# EAGLE board source_eagle (EAGLE 9.6.2)
REV: B
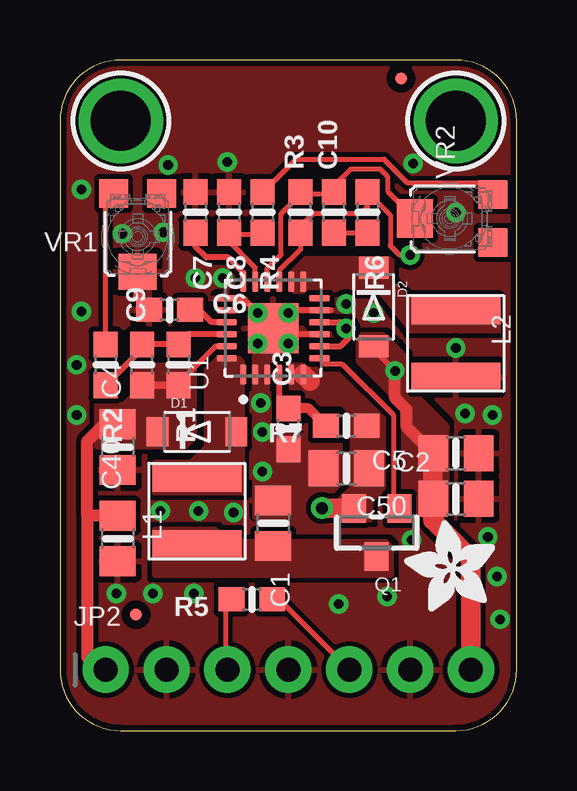
[diagram p0: board, top side]
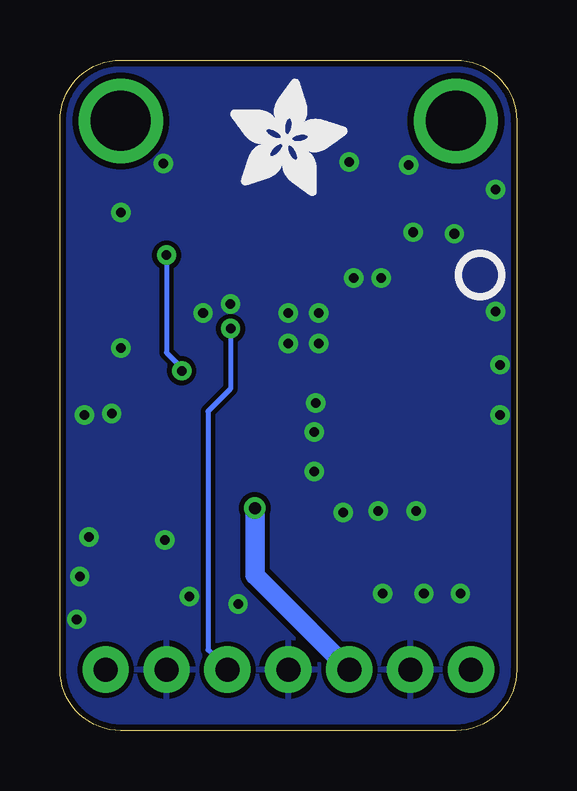
[diagram p1: board, bottom side, seen from below]

Size 19.05 x 27.94 mm. Coordinates in mm from the lower left corner, seen from the top.
Outline: 0,25.4 0,2.54 arc90 2.54,0 16.51,0 arc90 19.05,2.54 19.05,25.4 arc90 16.51,27.94 2.54,27.94 arc90 0,25.4
Copper layers (1*16): Top 0.035mm / dielectric 1.5mm / Bottom 0.035mm
Design rules "adafruit 7-7": minimum track width 7mil, minimum drill 15.5mil, track to track 8mil, track to pad 7mil, pad to pad 7mil, via to via 7mil, smd to smd 7mil, copper to edge 10mil, drill to drill 8mil, minimum pad ring 10mil, minimum via ring 8mil, stop-mask expansion 2mil, vias tented up to drill 20mil, thermal gap 10mil
Net classes: 3 HIGHPOWER: width 0.254 mm, drill 0.483 mm

## Footprints (pad centres in the part's own frame; a part is rotated, then mirrored left to right if it is on the bottom)
0805-NO = smd 1.24 x 1.5: 1 -0.95,0; 2 0.95,0
0603-NO = smd 1.075 x 1: 1 -0.85,0; 2 0.85,0
SOD-123FL = smd 0.91 x 1.22: A 1.637,0; C -1.637,0
FIDUCIAL_0.5MM = smd 0.5 x 0.5: 1 0,0
1X07_ROUND_76 = drill 1 pad 1.93: 1 -7.62,0; 2 -5.08,0; 3 -2.54,0; 4 0,0; 5 2.54,0; 6 5.08,0; 7 7.62,0
INDUCTOR_4X4MM_NR401 = smd 1.2 x 3.7: P$1 -1.4,0; P$2 1.4,0
SOT23-WIDE = smd 1 x 1.2: 1 -0.95,-1; 2 0.95,-1; 3 0,1
QFN24_4MM = smd 0.84 x 0.26: 1 -1.935,1.25; 2 -1.935,0.75; 3 -1.935,0.25; 4 -1.935,-0.25; 5 -1.935,-0.75; 6 -1.935,-1.25; 13 1.935,-1.25; 14 1.935,-0.75; 15 1.935,-0.25; 16 1.935,0.25; 17 1.935,0.75; 18 1.935,1.25 | smd 0.26 x 0.84: 7 -1.25,-1.935; 8 -0.75,-1.935; 9 -0.25,-1.935; 10 0.25,-1.935; 11 0.75,-1.935; 12 1.25,-1.935; 19 1.25,1.935; 20 0.75,1.935; 21 0.25,1.935; 22 -0.25,1.935; 23 -0.75,1.935; 24 -1.25,1.935 | smd 2.1 x 2.1: 25 0,0
MOUNTINGHOLE_2.5_PLATED = drill 2.5 pad 3.2: P$1 0,0
TRIMPOT_BOURNS_TC33X-2 = smd 1.2 x 1.2: 1 -1,-1.8; 3 1,-1.8 | smd 1.6 x 1.5: 2 0,1.45

## Placement (x,y rotation side)
C1  22uF/16V  [0805-NO]  8.89,8.64 270 top
C2  22uF/16V  [0805-NO]  11.94,10.92 0 top
C3  0.1uF  [0603-NO]  9.53,12.57 90 top
C4  22uF/16V  [0805-NO]  2.41,11.81 90 top
C5  22uF/16V  [0805-NO]  16.51,11.56 180 top
C6  10nF  [0603-NO]  4.57,17.53 0 top
C7  4.7nF  [0603-NO]  5.65,21.59 270 top
C8  220nF  [0603-NO]  7.05,21.59 270 top
C9  15pF  [0603-NO]  3.43,15.24 90 top
C10  15pF  [0603-NO]  11.43,21.59 90 top
C40  22uF/16V  [0805-NO]  2.41,8 90 top
C50  22uF/16V  [0805-NO]  16.51,9.65 180 top
D1  MBR120  [SOD-123FL]  5.71,12.45 0 top
D2  MBR120  [SOD-123FL]  13.08,17.65 270 top
FID1  FIDUCIAL_0.5MM  [FIDUCIAL_0.5MM]  3.17,4.83 0 top
FID2  FIDUCIAL_0.5MM  [FIDUCIAL_0.5MM]  14.22,27.18 0 top
JP2  [1X07_ROUND_76]  9.53,2.54 0 top
L1  4.7uH 2A / YSMC0420V-4R7M  [INDUCTOR_4X4MM_NR401]  5.71,9.14 90 top
L2  4.7uH 2A / YSMC0420V-4R7M  [INDUCTOR_4X4MM_NR401]  16.51,16.13 270 top
PLABEL0  [PLABEL0]  1.91,4.19 0 top
PLABEL1  [PLABEL1]  4.45,0.89 0 top
PLABEL2  [PLABEL2]  6.86,4.19 0 top
PLABEL3  [PLABEL3]  9.53,0.89 0 top
PLABEL4  [PLABEL4]  12.06,4.32 0 top
PLABEL5  [PLABEL5]  14.61,0.89 0 top
PLABEL6  [PLABEL6]  17.14,4.19 0 top
PLABEL7  [PLABEL7]  9.53,25.4 0 top
PLABEL8  [PLABEL8]  1.02,20.7 90 top
PLABEL9  [PLABEL9]  16.51,18.99 0 top
PLABEL10  [PLABEL10]  8.89,20.45 0 bottom
PLABEL11  [PLABEL11]  9.53,10.54 0 bottom
Q1  AO3401A  [SOT23-WIDE]  13.21,8.26 180 top
R1  560K  [0603-NO]  4.95,15.24 270 top
R2  47K  [0603-NO]  1.91,15.24 270 top
R3  750K  [0603-NO]  10.03,21.59 90 top
R4  59K  [0603-NO]  8.45,21.59 270 top
R5  47K  [0603-NO]  8,5.46 180 top
R6  47K  [0603-NO]  12.83,21.59 270 top
R7  100  [0603-NO]  11.94,12.7 180 top
U1  TPS65131  [QFN24_4MM]  8.89,16.76 90 top
U$1  MOUNTINGHOLE2.5  [MOUNTINGHOLE_2.5_PLATED]  2.54,25.4 0 top
U$2  MOUNTINGHOLE2.5  [MOUNTINGHOLE_2.5_PLATED]  16.51,25.4 0 top
U$3  [ADAFRUIT_3.5MM]  18.16,4.95 90 top
U$4  [ADAFRUIT_5MM]  11.94,22.29 0 bottom
U$5  [PCBFEAT-REV-040]  1.52,18.99 0 bottom
VR1  100K  [TRIMPOT_BOURNS_TC33X-2]  3.24,20.57 180 top
VR2  100K  [TRIMPOT_BOURNS_TC33X-2]  16.26,21.34 90 top

## Library data of the parts
C1-C10 C40 C50 D1 D2 FID1 FID2 JP2 L1 L2 R1-R7 U$3-U$5 = microbuilder
PLABEL0 PLABEL1-PLABEL11 = pinguin
Q1 = microbuilder; ROT: 270
U1 = adafruit_power; MANUFACTURER: Texas Instruments; PACKAGE: QFN50P400X400X100-25N
U$1 U$2 = adafruit_electromech; BOM: EXCLUDE
VR1 VR2 = microbuilder; ROT: 0

## Nets
+12V: C4.2 C9.1 C40.2 D1.C JP2.1 R1.2 U1.23
-12V: C5.2 C50.2 D2.A JP2.7 R3.1 R6.1 U1.15
BSW: Q1.1 U1.7
ENABLE: JP2.5 R5.1 U1.8 U1.10
FBN: C10.2 R3.2 U1.16 VR2.2
FBP: C9.2 R1.1 R2.2 U1.22
GND: C1.1 C2.1 C3.1 C4.1 C5.1 C6.1 C7.1 C8.1 C40.1 C50.1 JP2.2 JP2.4 JP2.6 L2.P$2 U1.2 U1.3 U1.9 U1.11 U1.19 U1.25 VR1.2
INP: D1.A L1.P$2 U1.1 U1.24
N$1: C6.2 U1.21
N$2: C1.2 L1.P$1 Q1.3
N$3: R2.1 VR1.3
N$4: R4.1 VR2.3
N$5: C10.1 R6.2
N$17: C7.2 U1.18
OUTN: D2.C L2.P$1 U1.13 U1.14
VDD: C2.2 JP2.3 Q1.2 R5.2 R7.1 U1.5 U1.6
VIN: C3.2 R7.2 U1.4
VREF: C8.2 R4.2 U1.17

## Tracks (layer width: path | path; a pad name or v marks a point on that pad's centre or on a via)
+12V
  Top 0.203: U1.23 6.49,16.01 4.95,14.48 R1.2
  Top 0.305: R1.2 C9.1
  Top 0.508: C40.2 1.14,8.95 | 1.14,8.95 1.14,3.05 1.65,2.54 JP2.1 | 1.14,8.95 1.14,12.06 1.84,12.76 C4.2
  pour Top (no thermals): 5.59,15.24 5.59,12.19 5.21,11.81 1.52,11.81 1.52,13.59 2.67,13.59 3.17,14.1 3.17,14.99 3.43,15.24
-12V  (via drill 0.39)
  Top 0.203: U1.15 9.14,19.15 10.03,20.04 R3.1 10.03,21.02 10.57,21.56 12.57,21.56 12.83,21.81 R6.1 13.78,21.49 13.78,20.21 14.18,19.81 v14.61,19.81 | v13.97,14.99 v13.98,14.99 13.08,15.89 D2.A
  Top 0.508: C5.2 14.46,12.66 14.46,13.38 13.97,13.87 v13.97,14.99
  Top 0.813: JP2.7 17.14,7.18 15.56,8.76 C50.2 C5.2
  Bottom 0.203: v14.61,19.81 14.61,15.75 13.97,15.11 v13.97,14.99
  pour Top (no thermals): 12.45,16.51 13.46,16.51 14.73,15.24 14.73,14.1 16.13,12.7 16.13,9.02 14.35,9.02 14.35,13.46 12.45,15.37
BSW
  Top 0.203: U1.7 11.08,15.26 11.79,15.26 13.9,13.15 13.9,9.51 Q1.1
ENABLE  (via drill 0.39)
  Top 0.203: 11.67,17.01 v11.93,16.75 | R5.1 9.14,5.46 JP2.5
  Top 0.254: U1.10 11.67,17.01 12.05,17.01 12.05,16.36 11.7,16.01 U1.8
  Bottom 0.203: v11.93,16.75 11.93,14.25 12.88,13.3 12.88,3.36 JP2.5
FBN
  Top 0.203: U1.16 8.64,19.25 9.22,19.83 9.22,21.54 10.03,22.35 | R3.2 10.03,22.35 | VR2.2 13.66,22.48 13.66,23.09 13.36,23.39 12.13,23.39 11.43,22.69 C10.2 11.34,22.35 10.03,22.35
FBP
  Top 0.254: R2.2 3.43,15.91 C9.2 R1.1 5.38,16.51 U1.22
GND  (via drill 0.4)
  Top 0.254: U1.19 7.36,18.01 7.4,17.97 7.68,17.97 U1.25 9.02,16.89 | 9.02,16.89 9.64,17.51 U1.11 11.29,17.51 | U1.9 9.39,16.51 9.02,16.89
  Top 0.406: C6.1 3.72,17.61 3.26,18.08 3.26,19.11 VR1.2
  other vias: 8.45,10.79 8.38,13.65 8.45,12.45 7.24,9.08 5.78,9.14 4.19,9.14 16.89,13.21 18.03,13.14 17.84,8.06 18.22,6.41 18.35,4.64 14.67,7.94 16.51,21.59 11.94,17.78 13.08,17.4 16.51,15.94 9.53,17.4 8.26,16.13 8.26,17.4 9.53,16.13 6.79,18.86 5.65,18.86 4.32,20.76 2.6,20.7 0.89,17.46 0.7,13.14 0.7,15.24 0.89,22.54 4.51,23.56 6.99,23.69 14.73,23.62 11.62,5.27 2.35,5.71 3.87,5.71 5.59,5.71 13.65,5.59
  pour Top (no thermals): 8.13,8.89 8.13,15.75 8.64,15.75 8.64,12.83 8.89,12.57 8.89,12.32 11.43,12.32 11.68,12.06 11.68,10.29 10.16,8.76 8.26,8.76
  pour Top (rank 2): 0,27.94 19.05,27.94 19.05,0 0,0
  pour Bottom (rank 2): 0,27.94 19.05,27.94 19.05,0 0,0
INP
  pour Top (no thermals): 3.94,11.18 3.94,9.91 7.62,9.91 7.62,15.37 7.49,15.49 6.48,15.49 6.1,15.11 6.1,11.81 5.46,11.18
N$1
  Top 0.254: U1.21 6.32,17.01 5.8,17.53 C6.2
N$2
  pour Top (no thermals): 3.94,8.38 3.94,6.48 13.84,6.48 13.84,7.62 13.59,7.87 6.99,7.87 6.48,8.38
N$3
  Top 0.203: R2.1 1.91,22.04 VR1.3
N$4
  Top 0.203: R4.1 8.47,22.44 9.84,23.81 13.51,23.81 14.51,22.81 17.58,22.81 VR2.3
N$5
  Top 0.203: C10.1 R6.2
N$17
  Top 0.254: U1.18 7.64,19.08 7,19.71 6.11,19.71 5.65,20.17 C7.2
OUTN
  pour Top (no thermals): 9.65,18.41 9.65,19.68 13.84,19.68 13.84,18.67 14.86,17.65 18.29,17.65 18.29,16.64 14.66,16.64 13.34,18.29 9.78,18.29
VDD  (via drill 0.5)
  Top 0.203: R5.2 6.9,5.21 6.9,2.63 JP2.3
  Top 0.813: Q1.2 10.94,9.26 v10.92,9.27 | U1.6 10.15,14.83 10.43,14.55
  Bottom 0.813: v10.92,9.27 10.92,6.48 JP2.3
  pour Top (no thermals): 9.65,13.59 9.65,15.24 11.94,15.24 13.59,13.59 13.59,10.16 12.95,9.53 12.95,8.76 11.68,8.76 11.68,9.65 12.19,10.16 12.19,13.21 11.81,13.59
VIN
  Top 0.254: U1.4 9.14,13.81 C3.2
  Top 0.406: R7.2 10.37,13.42 C3.2
VREF
  Top 0.203: U1.17 8.14,19.29 7,20.43 7.11,20.43 7.11,20.61 7.07,20.66 7.13,20.66 | 7.13,20.66 C8.2 | R4.2 8.36,20.66 7.13,20.66

## Text on the board
Pinguin_tBackup: TPS65131 / Split Boost | +6>15V | -6>15V | V+ | Vin | EN | V- | GND | GND | GND
Pinguin_bBackup: TPS65131 | Dual output split / supply booster / Vin: 2.7~5.5V / Vout Pos:+6~15V / Vout Neg:-6~-15V / Max Iout: 150mA / (from each rail)